# EAGLE board DataCollectorV1 v15 (EAGLE 9.7.0)
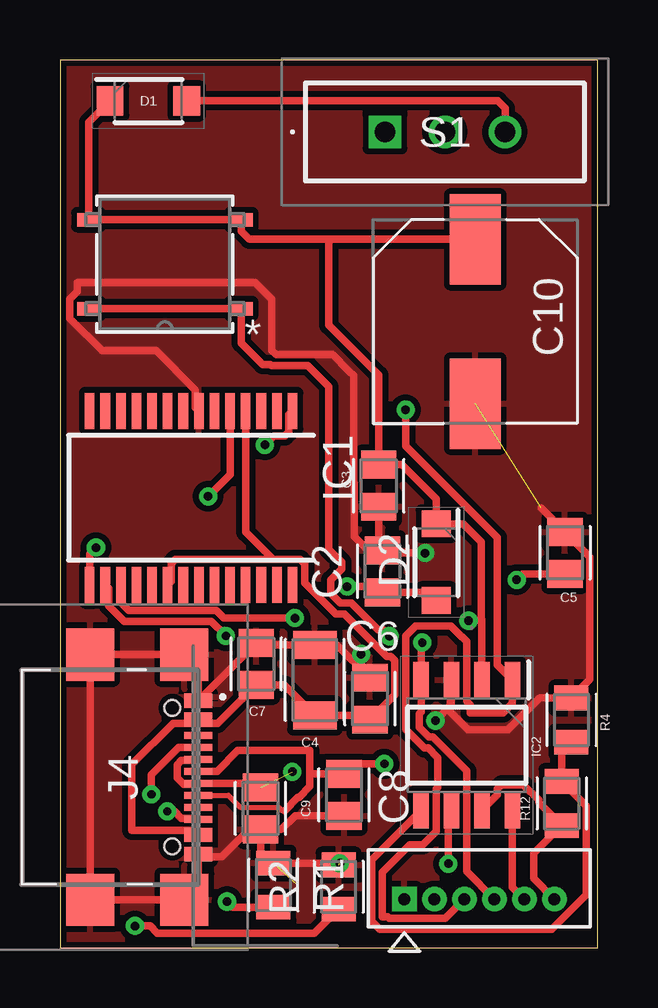
[diagram p0: board, top side]
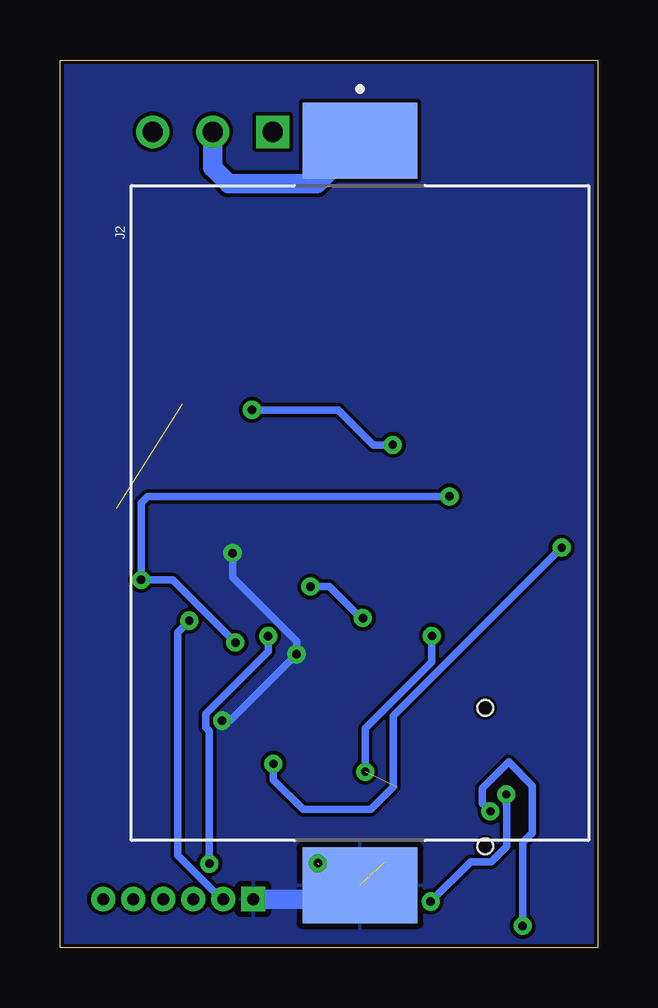
[diagram p1: board, bottom side, seen from below]

Size 22.4 x 37.01 mm. Coordinates in mm from the lower left corner, seen from the top.
Outline: 0,0 22.4,0 22.4,37.01 0,37.01 0,0
Copper layers (1*16): Top / Bottom
Stack-up Default Layer Stack: Top User Defined 0.035mm / Dielectric-1 User Defined 1.5mm / Bottom User Defined 0.035mm
Design rules: minimum copper width 6mil, minimum drill size 0.35mm, copper clearance wire_polygon to wire_polygon 6mil, copper clearance wire_polygon to pad_smd 6mil, copper clearance wire_polygon to via 6mil, copper clearance pad_smd to pad_smd 6mil, copper clearance pad_smd to via 6mil, copper clearance via to via 6mil, copper clearance smd to pad (same net) 6mil, copper clearance smd to via (same net) 6mil, copper clearance smd to smd (same net) 6mil, dimension clearance 6mil, via restrict clearance 0mil, restrict clearance 0mil, drill distance 6mil, keepout clearance 0mil

## Footprints (pad centres in the part's own frame; a part is rotated, then mirrored left to right if it is on the bottom)
CAPC2012X110 = smd 1.165 x 1.465: 1 -0.875,0; 2 0.875,0
CAPC3216X135 = smd 1.165 x 1.815: 1 -1.475,0; 2 1.475,0
CAPAE830X1050N = smd 3.764 x 2.115: 1 -3.426,0; 2 3.426,0
SODFL3718X130N = smd 1.12 x 1.22: 1 -1.6,0; 2 1.6,0
SSOP28 = smd 0.4 x 1.5: 1 -4.225,-3.625; 2 -3.575,-3.625; 3 -2.925,-3.625; 4 -2.275,-3.625; 5 -1.625,-3.625; 6 -0.975,-3.625; 7 -0.325,-3.625; 8 0.325,-3.625; 9 0.975,-3.625; 10 1.625,-3.625; 11 2.275,-3.625; 12 2.925,-3.625; 13 3.575,-3.625; 14 4.225,-3.625; 15 4.225,3.625; 16 3.575,3.625; 17 2.925,3.625; 18 2.275,3.625; 19 1.625,3.625; 20 0.975,3.625; 21 0.325,3.625; 22 -0.325,3.625; 23 -0.975,3.625; 24 -1.625,3.625; 25 -2.275,3.625; 26 -2.925,3.625; 27 -3.575,3.625; 28 -4.225,3.625
SOIC127P600X175-8N = smd 1.525 x 0.65: 1 -2.712,1.905; 2 -2.712,0.635; 3 -2.712,-0.635; 4 -2.712,-1.905; 5 2.712,-1.905; 6 2.712,-0.635; 7 2.712,0.635; 8 2.712,1.905
CON_530470610_MOL = drill 0.5 pad 0.85 square: 1 0,0 | drill 0.5 pad 0.85: 2 -1.25,0; 3 -2.5,0; 4 -3.75,0; 5 -5,0; 6 -6.25,0
796136-1 = smd 3.15 x 4.78: 1 -15.52,0; 2 15.52,0
USB4110GFA = smd 0.3 x 1.15: A1 -3.35,3.678; A4 -2.55,3.678; A5 -1.25,3.678; A6 -0.25,3.678; A7 0.25,3.678; A8 1.25,3.678; A9 2.55,3.678; A12 3.35,3.678; B1 3.05,3.678; B4 2.25,3.678; B5 1.75,3.678; B6 0.75,3.678; B7 -0.75,3.678; B8 -1.75,3.678; B9 -2.25,3.678; B12 -3.05,3.678 | smd 2.18 x 2: MP1 -5.11,-0.827; MP2 5.11,-0.827; MP3 -5.11,3.103; MP4 5.11,3.103 | hole 0.65: -2.89,2.603; 2.89,2.603
RESC2012X65 = smd 1.031 x 1.42: 1 -0.919,0; 2 0.919,0
SLW1166415ASD = drill 0.84 pad 1.365 square: 1 0,0 | drill 0.84 pad 1.365: 2 2.5,0; 3 5,0
SMT_FS = smd 0.953 x 0.559: 1 -3.181,1.854; 2 3.181,1.854; 3 -3.181,-1.854; 4 3.181,-1.854

## Placement (x,y rotation side)
C2  100nF  [CAPC2012X110]  13.44,15.7 90 top
C3  100nF  [CAPC2012X110]  13.28,19.26 270 top
C4  4.7uF x 6.3V  [CAPC3216X135]  10.62,11.16 270 top
C5  1uF  [CAPC2012X110]  21.04,16.47 90 top
C6  100nF  [CAPC2012X110]  12.92,10.39 270 top
C7  10nF  [CAPC2012X110]  8.18,11.84 270 top
C8  47pF  [CAPC2012X110]  11.84,6.38 270 top
C9  47pF  [CAPC2012X110]  8.36,5.82 270 top
C10  [CAPAE830X1050N]  17.3,26.11 270 top
D1  SL1J  [SODFL3718X130N]  3.68,35.31 0 top
D2  SL1J  [SODFL3718X130N]  15.68,16.08 270 top
IC1  FT232RN  [SSOP28]  5.46,18.76 180 top
IC2  STM32C011J6M6  [SOIC127P600X175-8N]  16.95,8.45 270 top
J1  530470610CON_530470610_MOL  [CON_530470610_MOL]  14.35,2.03 180 top
J2  796136-1  [796136-1]  9.91,18.13 270 bottom
J4  USB4110-GF-A  [USB4110GFA]  2.08,7.11 270 top
R1  5k1  [RESC2012X65]  8.89,2.62 270 top
R2  5k1  [RESC2012X65]  11.61,2.54 90 top
R4  NTC10K  [RESC2012X65]  21.31,9.5 90 top
R12  20k  [RESC2012X65]  20.91,6.02 90 top
S1  SLW-116641-5A-S-D  [SLW1166415ASD]  13.54,34.02 0 top
U1  PTS526_SK15_SMTR2_LFSSMT_FS  [SMT_FS]  4.37,28.5 180 top

## Library data of the parts
C2-C10 = Capacitor; CATEGORY: Capacitor
D1 D2 = SL1J; DESCRIPTION: Rectifier Diode Switching 600V 1A 1000ns 2-Pin SOD-123FL T/R; HEIGHT: 1.3mm; MANUFACTURER_NAME: Diotec; MANUFACTURER_PART_NUMBER: SL1J; MOUSER_PART_NUMBER: 637-SL1J; MOUSER_PRICE-STOCK: https://www.mouser.co.uk/ProductDetail/Diotec-Semiconductor/SL1J?qs=OlC7AqGiEDm%2FUyNJqMVviA%3D%3D
IC1 = IC_Interface; CATEGORY: IC_Interface; MANUFACTURER: FTDI Chip; MPN: FT232RL; OPERATING_TEMP: -40 to 85°C; PART_STATUS: Active; ROHS_COMPLIANT: Compliant; SUB-CATEGORY: Controller; THERMALLOSS: 0.5W; TYPE: USB to UART
IC2 = STM32C011J6M6; DESCRIPTION: Mainstream Arm Cortex-M0+ MCU with 32 Kbytes of Flash memory, 6 Kbytes RAM, 48 MHz CPU, 2x USART, timers, ADC, comm. I/F, 2-3.6V; HEIGHT: 1.75mm; MANUFACTURER_NAME: STMicroelectronics; MANUFACTURER_PART_NUMBER: STM32C011J6M6; MOUSER_PART_NUMBER: 511-STM32C011J6M6; MOUSER_PRICE-STOCK: https://www.mouser.co.uk/ProductDetail/STMicroelectronics/STM32C011J6M6?qs=IPgv5n7u5Qas2LaNYHG%2FbQ%3D%3D
J1 = Library; COPYRIGHT: Copyright (C) 2024 Ultra Librarian. All rights reserved.; MANUFACTURER_PART_NUMBER: 530470610; MFR_NAME: Molex Connector Corporation
J2 = Connectors; CREATED_BY: PCBLayout.com; DIGIKEY_PART_NUMBER: A99327CT-ND; MANUFACTURER: TE Connectivity AMP Connectors; MPN: 796136-1
J4 = USB4110-GF-A; DESCRIPTION: CONN USB 2.0 TYPE-C R/A SMT; HEIGHT: 3.26mm; MANUFACTURER_NAME: GCT (GLOBAL CONNECTOR TECHNOLOGY); MANUFACTURER_PART_NUMBER: USB4110-GF-A; MOUSER_PART_NUMBER: 640-USB4110-GF-A; MOUSER_PRICE-STOCK: https://www.mouser.co.uk/ProductDetail/GCT/USB4110-GF-A?qs=KUoIvG%2F9IlYiZvIXQjyJeA%3D%3D
R1 R2 R4 R12 = Resistor; CATEGORY: Resistor; SUB-CATEGORY: Fixed
S1 = SLW-116641-5A-S-D; ARROW_PART_NUMBER: SLW-116641-5A-S-D; ARROW_PRICE-STOCK: https://www.arrow.com/en/products/slw-116641-5a-s-d/cui-devices?utm_currency=USD&region=nac; DESCRIPTION: 11.6 x 6 x 4.1 mm, 5 mm Raised Slide Actuator, Through Hole, Slide Switch; HEIGHT: 11.3mm; MANUFACTURER_NAME: Same Sky; MANUFACTURER_PART_NUMBER: SLW-116641-5A-S-D; MOUSER_PART_NUMBER: 179-SLW1166415ASD; MOUSER_PRICE-STOCK: https://www.mouser.co.uk/ProductDetail/Same-Sky/SLW-116641-5A-S-D?qs=IKkN%2F947nfBZSdW8n5Vqgw%3D%3D
U1 = 2023-10-17_07-06-43_Library; COPYRIGHT: Copyright (C) 2023 Ultra Librarian. All rights reserved.; MANUFACTURER_PART_NUMBER: PTS526 SK15 SMTR2 LFS; MFR_NAME: C&K Components

## Nets
AGND: IC1.25
BAT+: D1.2 S1.3
CC1: J4.A5 R1.2
CC2: J4.B5 R2.1
DN: C9.1 IC1.16 J4.A7 J4.B7
DP: C8.1 IC1.15 J4.A6 J4.B6
GND: C2.2 C3.2 C4.1 C5.2 C6.1 C7.1 C8.2 C9.2 C10.2 IC1.7 IC2.3 J1.1 J2.2 J4.A1 J4.A12 J4.B1 J4.B12 J4.MP1 J4.MP2 J4.MP3 J4.MP4 R1.1 R2.2 R4.2
GND1: IC1.18
GND2: IC1.21
MEMORY: IC2.6 U1.1 U1.2
NTC: IC2.5 R4.1 R12.2
POS_BAT: J2.1 S1.2
RST-TXD: C5.1 IC1.5 IC2.4 J1.4
RXD: IC1.1 IC2.1 J1.3
SWCLK: IC2.8 J1.5
SWDIO: IC2.7 J1.6 R12.1
USB-3V3: C2.1 D2.2 IC1.17
VBUS: C4.2 C6.2 C7.2 IC1.4 IC1.20 J4.A4 J4.A9 J4.B4 J4.B9
VDD: C3.1 C10.1 D1.1 D2.1 IC2.2 J1.2 U1.3 U1.4

## Tracks (layer width: path | path; a pad name or v marks a point on that pad's centre or on a via)
BAT+
  Top 0.305: D1.2 18.24,35.31 18.54,35 S1.3
CC1  (via drill 0.35)
  Top 0.305: R1.2 7.19,1.7 v6.96,1.93 | J4.A5 4.96,8.36 3.81,7.21 v3.81,6.4
  Bottom 0.305: v6.96,1.93 5.3,3.59 4.42,3.59 3.79,4.23 3.79,5.97 3.81,5.99 v3.81,6.4
CC2  (via drill 0.35)
  Top 0.305: v3.12,0.91 3.75,0.91 4.06,0.61 10.6,0.61 R2.1 | J4.B5 5.72,5.41 5.06,5.41 4.78,5.69 v4.47,5.69
  Bottom 0.305: v3.12,0.91 3.12,4.39 2.72,4.8 2.72,6.76 3.71,7.75 4.81,6.64 4.81,6.03 v4.47,5.69
DN  (via drill 0.35)  (1 unrouted)
  Top 0.305: IC1.16 2.03,14.99 2.03,14.26 2.67,13.62 6.31,13.62 6.91,13.02 v6.91,13.01 | J4.B7 5.72,7.82 5.06,7.82 4.88,7.64 4.88,7.09 5.15,6.82 5.72,6.82 J4.A7 8.19,6.86 C9.1
  Bottom 0.305: v6.91,13.01 6.91,11.92 9.68,9.15 v9.68,7.34
DP  (via drill 0.35)
  Top 0.203: J4.B6 7.01,6.36 7.52,5.86 9.12,5.86 9.26,5.71 9.36,5.71
  Top 0.305: J4.A6 6.54,7.36 7.41,8.23 10.41,8.23 10.41,7.26 | 10.41,7.26 C8.1 12.25,7.67 v13.51,7.67 | IC1.15 1.24,16.43 v1.5,16.69 | 9.36,5.71 9.92,6.28 9.97,6.28 10.41,6.72 10.41,7.26
  Bottom 0.305: v1.5,16.69 8.51,9.68 8.51,6.71 9.45,5.77 12.27,5.77 13.51,7.01 v13.51,7.67
GND  (via drill 0.35)  (3 unrouted)
  Top 0.305: 20.04,18.34 C5.2 22.08,16.3 22.08,11.19 R4.2 19.98,10.42 18.66,9.09 17.01,9.09 16.26,9.84 16.26,11.11 IC2.3 16.31,10.14 v15.65,9.47 | IC1.7 5.64,22.53 5.64,23.26 4.01,24.89 1.8,24.89 1.75,24.89 0.41,26.24 0.41,27.05 0.71,27.36 0.71,27.74 8.13,27.74 8.82,27.04 8.82,24.9 9,24.72 11.37,24.72 12.04,24.05 12.24,23.85 12.24,19.43 12.27,19.4 12.27,17.14 12.84,16.57 C2.2 | C2.2 13.28,16.73 C3.2 | v12.55,12.24 12.55,11.63 C6.1 11.54,12.64 C4.1 8.25,12.64 C7.1 5.93,10.46 J4.A1 J4.B12 5.76,11.65 J4.MP3 J4.MP1 J4.MP2 J4.MP4 5.76,2.58 J4.B1 J4.A12 5.78,3.79 6.73,3.79 7.8,4.85 7.85,4.9 7.89,4.94 C9.2 | v15.21,16.46 13.55,16.46 C2.2 | v11.66,3.53 8.78,3.53 8.36,3.95 C9.2 | C8.2 9.79,5.51 9.23,4.94 C9.2
  Bottom 0.305: 10.48,2.03 10.25,2.26 J2.2 10.73,2.61 v11.66,3.53 | v15.21,16.46 15.21,15.44 13.66,13.89 12.55,12.78 v12.55,12.24 15.32,9.47 v15.65,9.47
  Bottom 0.813: J1.1 10.48,2.03
  pour Bottom: 0.15,36.93 22.25,36.93 22.25,0.2 0.15,0.2 0.15,0.1
  pour Top (isolate 0.254): 0.15,36.8 22.28,36.8 22.28,0.15 0.13,0.15 0.13,0.2
MEMORY  (via drill 0.35)
  Top 0.305: U1.2 U1.1 7.55,25.22 8.45,24.32 8.76,24.32 8.81,24.27 10.33,24.27 11.2,23.39 11.2,16.61 11.73,16.08 11.73,15.8 11.28,15.35 11.28,14.78 11.68,14.38 12.13,14.38 13.27,13.25 13.47,13.25 v13.73,12.99 | IC2.6 16.18,5.61 v16.18,3.51
  Bottom 0.305: v16.18,3.51 16.18,9.04 16.33,9.19 16.33,9.76 13.73,12.36 v13.73,12.99
NTC
  Top 0.305: R4.1 20.91,8.18 R12.2 21.92,5.92 21.92,2.21 20.48,0.77 13.32,0.77 12.98,1.11 12.98,3.67 IC2.5
POS_BAT
  Bottom 0.305: 9.44,34.11 J2.1
  Bottom 0.813: J2.1 10.42,33.13 | 10.42,33.13 11.7,31.85 15.37,31.85 16.04,32.52 S1.2 | 9.44,34.11 10.42,33.13
RST-TXD  (via drill 0.35)
  Top 0.305: 15.04,11.28 IC2.4 | v19.02,15.34 19.28,15.59 C5.1 | IC1.5 7.09,19.74 v6.17,18.82 | J1.4 16.94,3.19 16.94,7.38 15.53,8.79 15.36,8.79 14.96,9.19 14.96,9.76 15.04,9.84 15.04,11.28 | 15.04,11.28 15.04,12.67 v15.1,12.73
  Bottom 0.305: v6.17,18.82 18.75,18.82 18.97,18.59 19.02,18.54 v19.02,15.34 17.71,15.34 v15.1,12.73
RXD  (via drill 0.35)
  Top 0.305: J1.3 16.05,1.22 13.72,1.22 13.65,1.29 13.44,1.29 13.44,3.15 14.58,4.29 15.12,4.29 15.68,4.86 15.68,6.63 15.75,6.69 15.75,7.92 15.34,8.33 15.17,8.33 14.41,9.1 14.41,12.71 14.41,13.01 14.81,13.41 16.28,13.41 16.73,12.96 16.76,12.96 16.95,12.77 16.95,10.27 17.09,10.13 17.09,9.8 18.47,9.8 18.85,10.19 IC2.1 18.21,11.8 18.21,17.11 14.4,20.92 v14.4,22.43 | IC1.1 9.54,22.24 9.54,21.51 9.36,21.33 8.9,21.33 v8.54,20.97
  Bottom 0.305: v14.4,22.43 10.81,22.43 9.35,20.97 v8.54,20.97
SWCLK
  Top 0.305: IC2.8 18.85,2.53 J1.5
SWDIO
  Top 0.305: J1.6 19.74,2.9 19.74,3.93 R12.1 19.94,6.07 19.94,6.17 19.3,6.8 18.4,6.8 18.22,6.63 18.22,6.38 IC2.7
USB-3V3  (via drill 0.35)
  Top 0.305: v11.96,15.06 13.2,15.06 C2.1 15.33,14.82 D2.2 | IC1.17 2.54,14.4 2.87,14.07 6.5,14.07 6.83,13.75 v9.79,13.75
  Bottom 0.305: v11.96,15.06 11.18,15.06 9.86,13.75 v9.79,13.75
VBUS
  Top 0.305: J4.B9 J4.A4 | J4.B9 6.58,9.36 C7.2 9.34,10.96 C4.2 12.74,9.69 C6.2 13.95,10.55 13.95,11.97 13.77,12.15 13.61,12.15 11.83,13.92 11.49,13.92 10.19,15.22 10.19,16.01 10.01,16.19 8.88,16.19 | IC1.4 7.74,17.33 7.77,17.3 | J4.B4 J4.A9 5.42,4.91 3,4.91 3,7.65 4.71,9.36 J4.B9 | 8.88,16.19 7.77,17.3 | 7.77,17.3 8.88,16.19 | 8.88,16.19 4.81,16.19 4.63,16.01 4.63,15.28 IC1.20
VDD  (via drill 0.35)
  Top 0.305: 17.58,13.69 IC2.2 | 17.58,13.69 17.55,13.72 17.55,16.92 16.79,17.68 D2.1 15.68,18.71 14.24,20.14 C3.1 13.28,23.88 11.21,25.95 11.21,29.41 11.33,29.54 | D1.1 1.19,34.41 U1.4 U1.3 7.55,29.87 7.88,29.54 11.33,29.54 | v17.02,13.64 17.54,13.64 17.58,13.69 | 11.33,29.54 C10.1
  Bottom 0.305: J1.2 15.67,2.03 17.5,3.86 17.5,13.16 v17.02,13.64